# Altium PCB MainBoard_PCB.PcbDoc (part 1 of 2)
Units mm, origin at the board's own origin, x right, y up, seen from the top; angles counter-clockwise.
Board outline 240.1 x 211.02 mm, 2 copper layers (Top Layer, Bottom Layer), stack 3 mm thick; 164 components, 42 nets, 290 pads, 108 vias.
Unrouted connection lines stored in the file: 1.
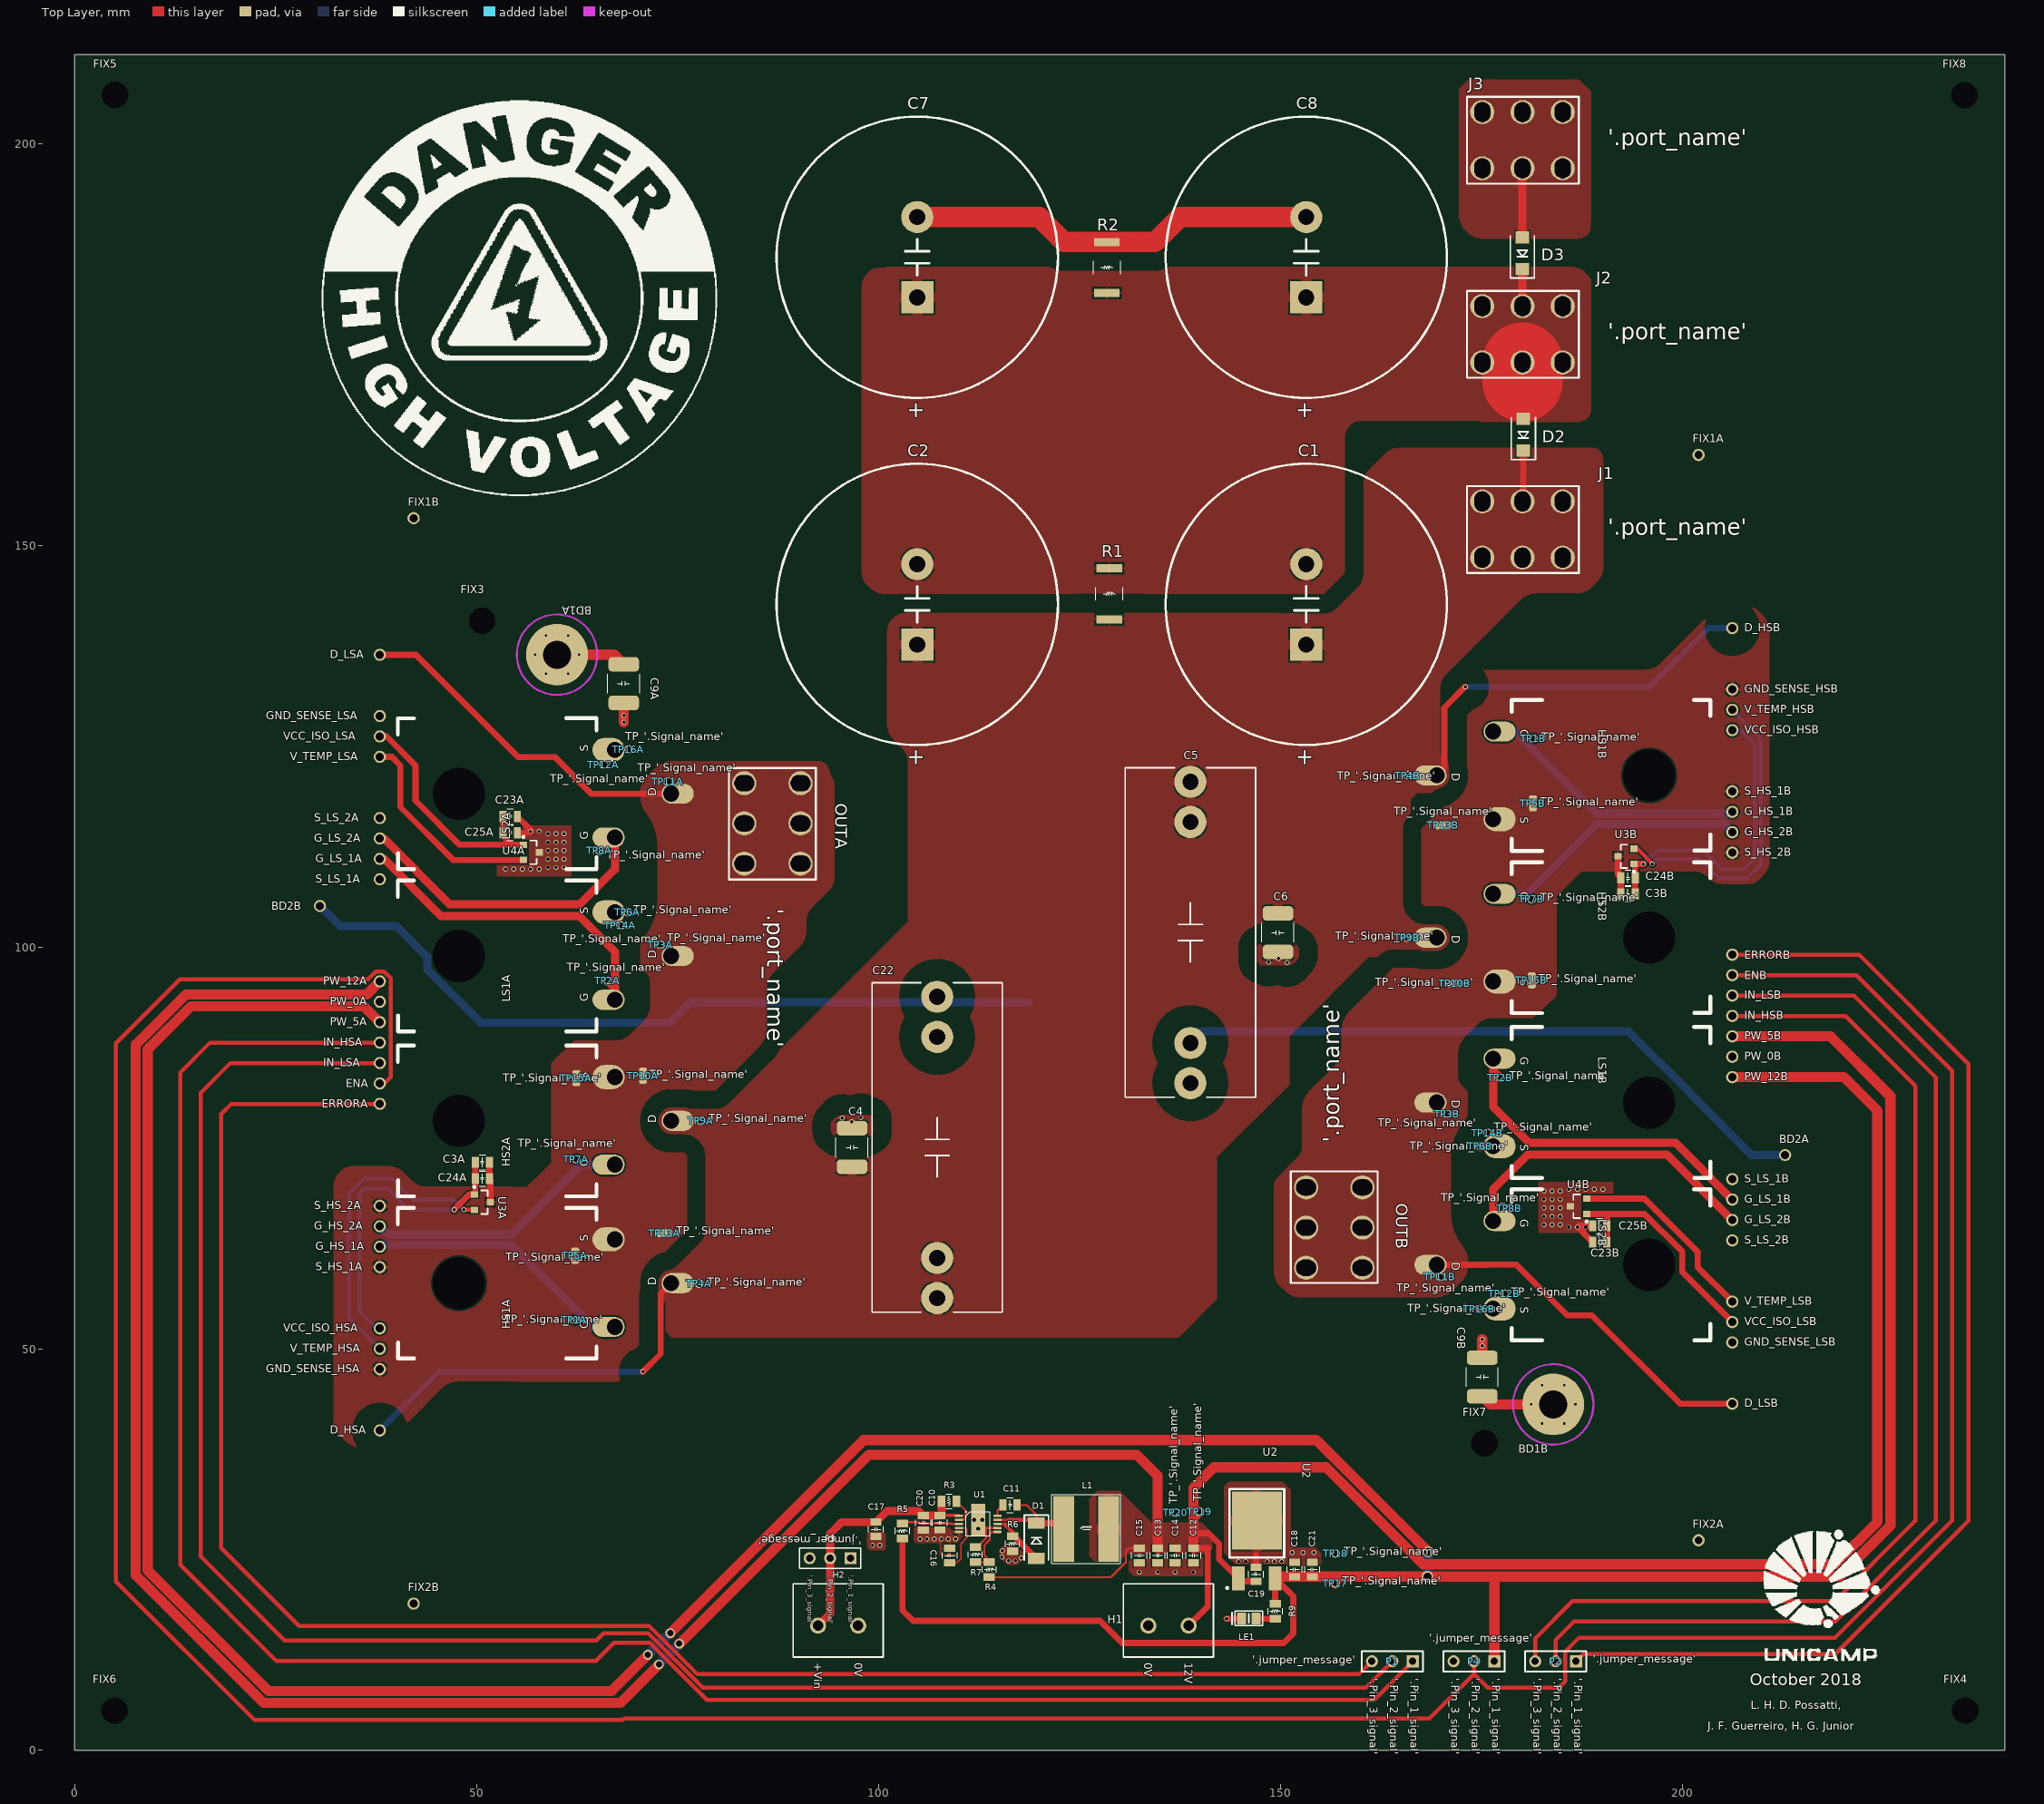
[diagram p0: Top Layer view]
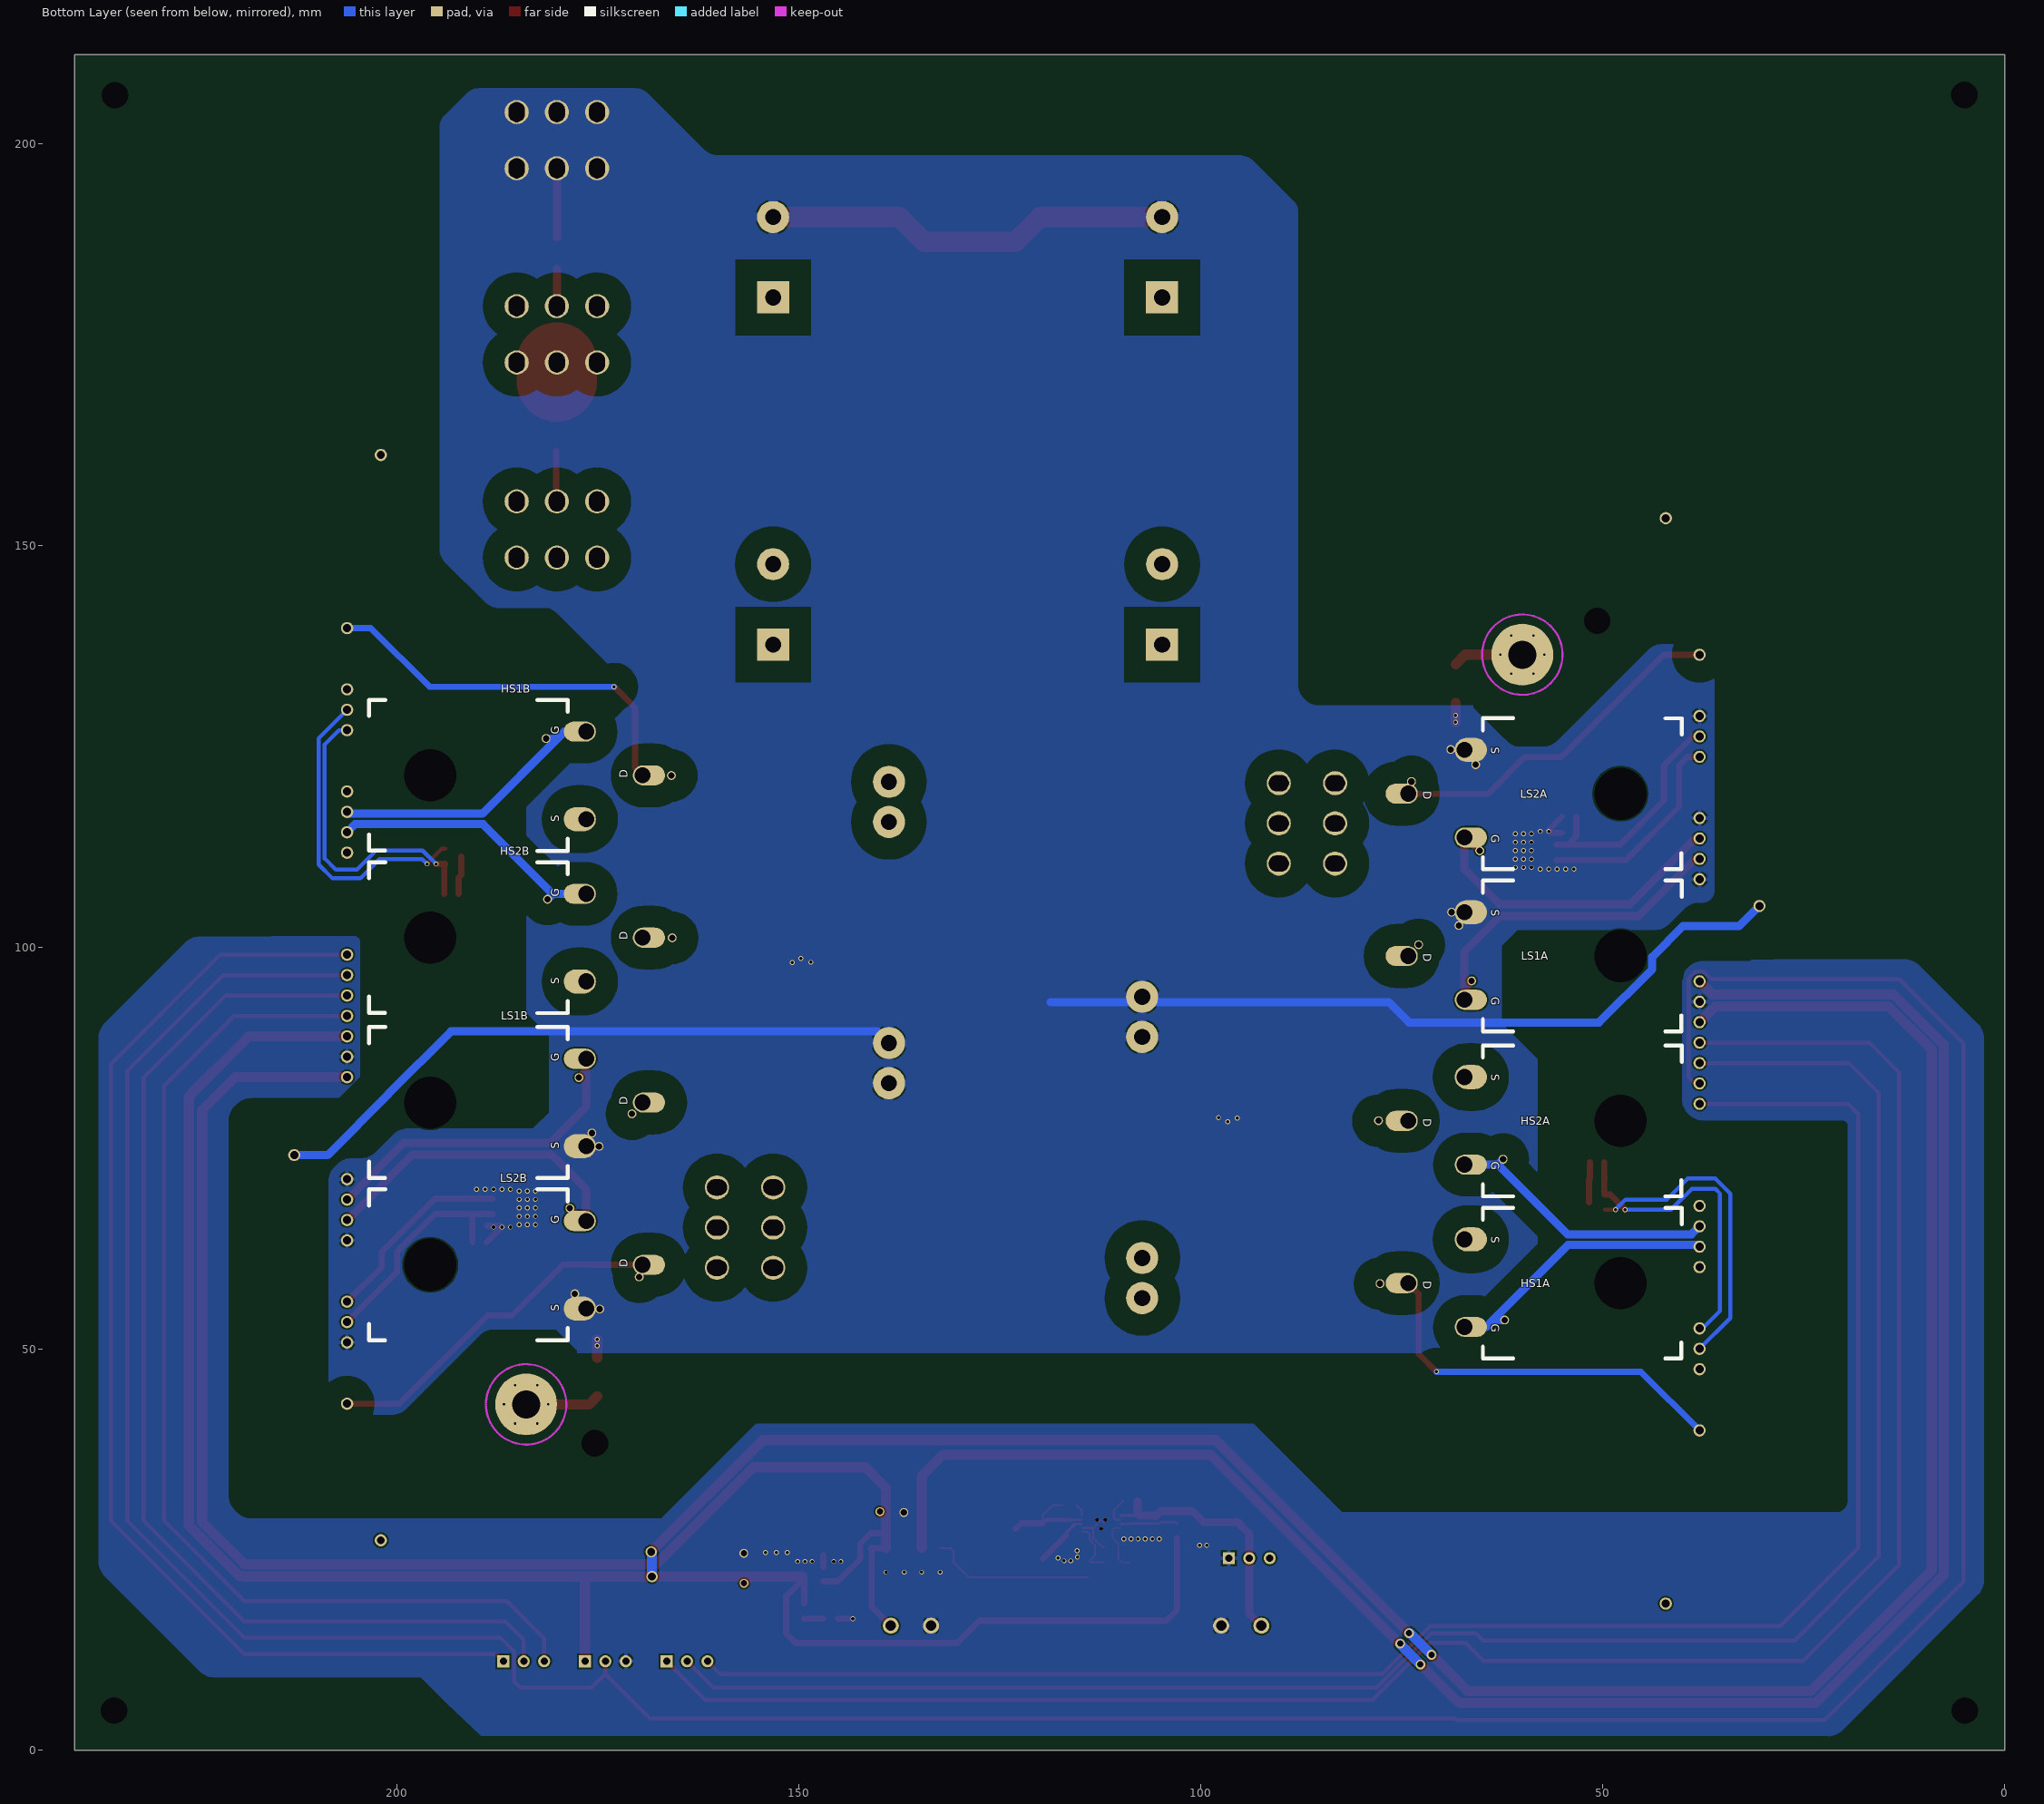
[diagram p1: Bottom Layer view, seen from below]
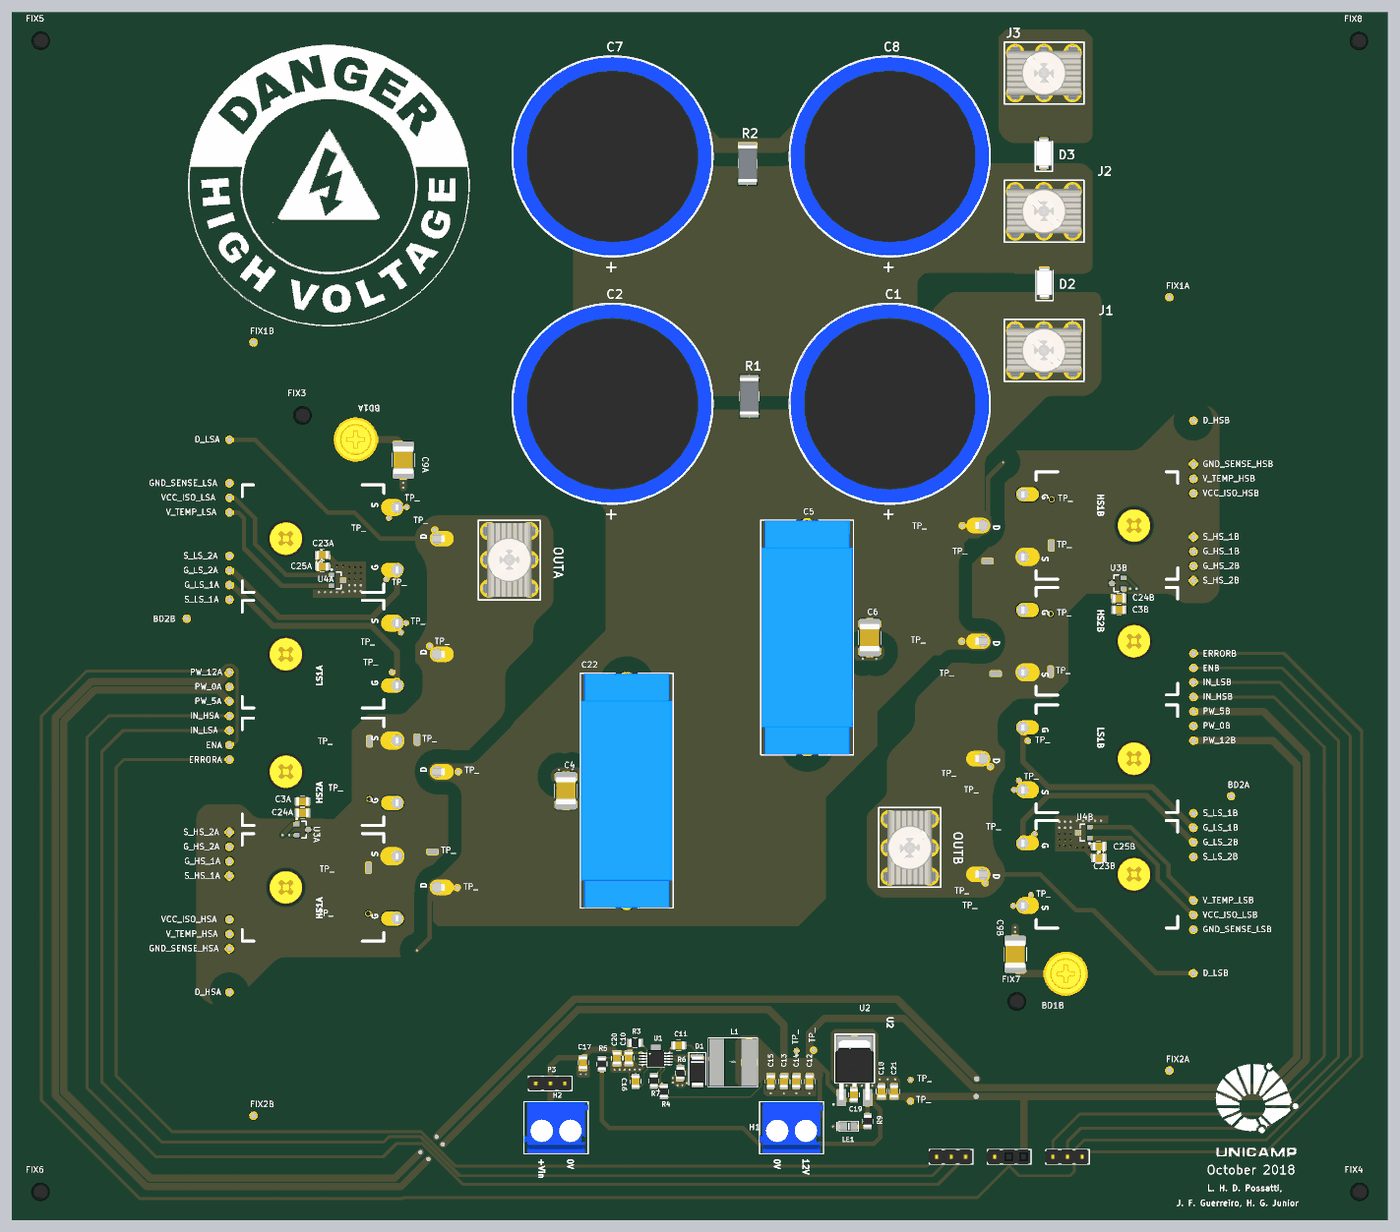
[diagram p3: 3D render of the assembled board from above, using the file's embedded part models]
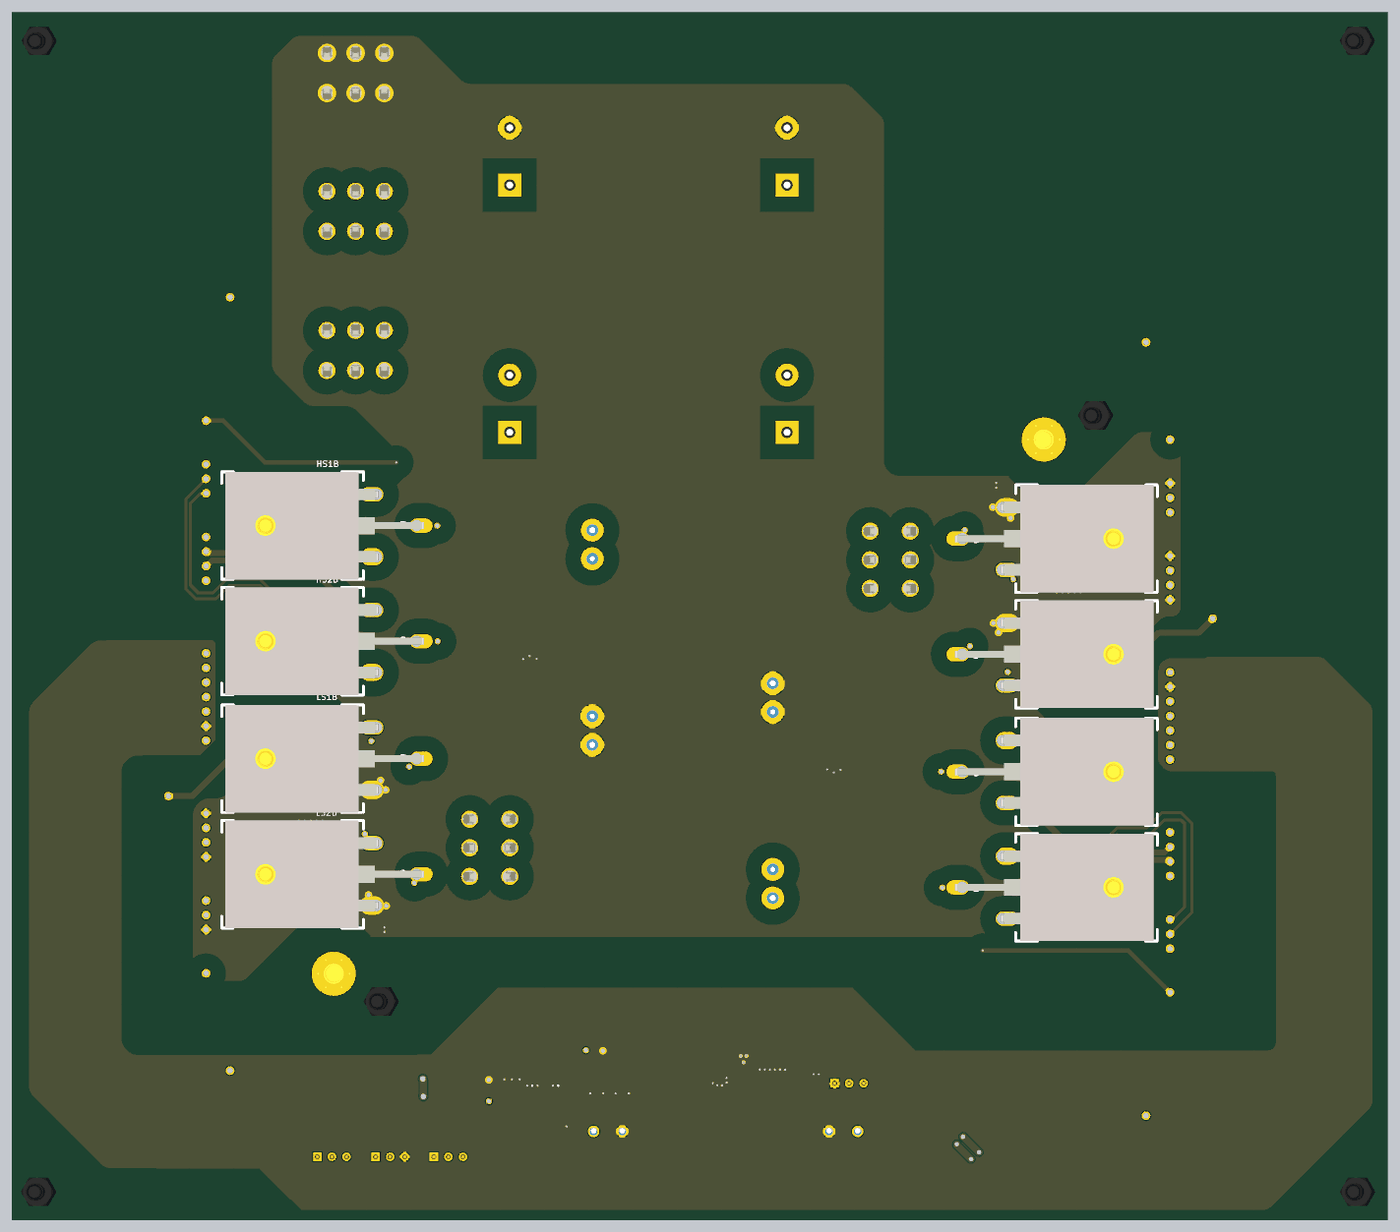
[diagram p4: 3D render of the assembled board from below, using the file's embedded part models]

## Layer stack, top to bottom
Top Solder: solder mask 0.0102, Solder Resist, Dk 3.5
Top Layer: signal copper 0.7
Dielectric 1: dielectric 1.6, FR-4, Dk 4.8
Bottom Layer: signal copper 0.7
Bottom Solder: solder mask 0.0102, Solder Resist, Dk 3.5

## Board outline
0,0 240.1,0 240.1,211.023 0,211.023

## Design rules (kind name [scope] priority, off if disabled: settings)
Clearance High_voltage_tented_vias [(ObjectKind = 'Via') And ((SolderMaskTentingTop = 'True') AND (SolderMaskTentingBottom = 'True')) And    InNetClass('-DC_link_level') vs InNetClass('+DC_link_level') OR InNetClass('Output_voltage_level') OR InNetClass('Other_high_voltage')] p1: gap=2.7 ignorepadtopadclearanceinfootprint=FALSE except(0.254: Arc-Text Track-Text SMDPad-Text THPad-Text Via-Text Fill-Text Poly-Text Region-Text Text-Text Text-Hole; 2.3: Arc-Arc Arc-Track Arc-Via Arc-Fill Arc-Poly Arc-Region Track-Track Track-Via Track-Fill Track-Poly Track-Region Via-Via Fill-Fill Fill-Poly Fill-Region Poly-Poly Poly-Region Region-Region; 3: SMDPad-SMDPad SMDPad-THPad SMDPad-Hole THPad-THPad THPad-Hole Via-Hole)
Clearance High_Voltage_case1 [InNetClass('+DC_link_level') vs InNetClass('-DC_link_level') OR InNetClass('Output_voltage_level') OR InNetClass('Other_high_voltage')] p2: gap=2.7 ignorepadtopadclearanceinfootprint=FALSE except(0.254: Arc-Text Track-Text SMDPad-Text THPad-Text Via-Text Fill-Text Poly-Text Region-Text Text-Text Text-Hole; 2.3: Arc-Arc Arc-Track Arc-Fill Arc-Poly Arc-Region Track-Track Track-Fill Track-Poly Track-Region Fill-Fill Fill-Poly Fill-Region Poly-Poly Poly-Region Region-Region; 3: SMDPad-SMDPad SMDPad-THPad SMDPad-Via SMDPad-Hole THPad-THPad THPad-Via THPad-Hole Via-Via Via-Hole)
Clearance High_Voltage_case2 [InNetClass('-DC_link_level') vs InNetClass('Output_voltage_level') OR InNetClass('Other_high_voltage')] p3: gap=2.7 ignorepadtopadclearanceinfootprint=FALSE except(0.254: Arc-Text Track-Text SMDPad-Text THPad-Text Via-Text Fill-Text Poly-Text Region-Text Text-Text Text-Hole; 2.3: Arc-Arc Arc-Track Arc-Fill Arc-Poly Arc-Region Track-Track Track-Fill Track-Poly Track-Region Fill-Fill Fill-Poly Fill-Region Poly-Poly Poly-Region Region-Region; 3: SMDPad-SMDPad SMDPad-THPad SMDPad-Via SMDPad-Hole THPad-THPad THPad-Via THPad-Hole Via-Via Via-Hole)
Clearance High_Voltage_case3 [InNetClass('Output_voltage_level') vs InNetClass('Other_high_voltage')] p4: gap=2.7 ignorepadtopadclearanceinfootprint=FALSE except(0.254: Arc-Text Track-Text SMDPad-Text THPad-Text Via-Text Fill-Text Poly-Text Region-Text Text-Text Text-Hole; 2.3: Arc-Arc Arc-Track Arc-Fill Arc-Poly Arc-Region Track-Track Track-Fill Track-Poly Track-Region Fill-Fill Fill-Poly Fill-Region Poly-Poly Poly-Region Region-Region; 3: SMDPad-SMDPad SMDPad-THPad SMDPad-Via SMDPad-Hole THPad-THPad THPad-Via THPad-Hole Via-Via Via-Hole)
Clearance High_Voltage_case4 [InNetClass('+DC_link_level') OR InNetClass('-DC_link_level') OR InNetClass('Output_voltage_level') OR InNetClass('Other_high_voltage') vs Not(InNetClass('+DC_link_level') OR InNetClass('-DC_link_level') OR InNetClass('Output_voltage_level') OR InNetClass('Other_high_voltage')) AND InLayerClass('Electrical Layers')] p5: gap=4 ignorepadtopadclearanceinfootprint=TRUE except(0.254: Arc-Text Track-Text SMDPad-Text THPad-Text Via-Text Fill-Text Poly-Text Region-Text Text-Text Text-Hole; 3.5: Arc-Fill Arc-Poly Arc-Region Track-Fill Track-Poly Track-Region Fill-Fill Fill-Poly Fill-Region Poly-Poly Poly-Region Region-Region; 5: Arc-Hole Track-Hole SMDPad-SMDPad SMDPad-THPad SMDPad-Via SMDPad-Hole THPad-THPad THPad-Via THPad-Hole Via-Via Via-Hole Fill-Hole Poly-Hole Region-Hole)
Clearance [All] p6: gap=0.203 ignorepadtopadclearanceinfootprint=TRUE
ComponentClearance Test_points [InComponentClass('test_point') vs InComponentClass('Mosfets') OR InComponentClass('test_point')] p1: gap=0 collisioncheckmode=3 verticalgap=0 showdistances=FALSE
ComponentClearance Mosfets_positioning [InComponentClass('Mosfets') vs InComponentClass('Mosfets')] p2: gap=0 collisioncheckmode=3 verticalgap=0.254 showdistances=FALSE
ComponentClearance [All] p3: gap=0.254 collisioncheckmode=3 verticalgap=0.254 showdistances=FALSE
Height [All] p1: minheight=0 maxheight=50 prefheight=12.7
HoleSize [All] p1: absolutevalues=TRUE maxlimit=6.6 minlimit=0.3 maxpercent=80.000 minpercent=20.000
HoleToHoleClearance [NOT InComponentClass('test_point') vs NOT InComponentClass('test_point')] p1: gap=0.254 allowstackedmicrovias=TRUE
MinimumSolderMaskSliver [All] p1: minsoldermaskwidth=0.152
PolygonConnect Direct_connect [InComponentClass('Direct_plane_connect')] p1: connectstyle=Direct reliefconductorwidth=0.254 reliefentries=4 polygonreliefangle="90 Angle" airgapwidth=0.254
PolygonConnect strong_connections [InComponentClass('strong_connection')] p2: connectstyle=Relief reliefconductorwidth=1.25 reliefentries=4 polygonreliefangle="90 Angle" airgapwidth=0.2
PolygonConnect [All] p3: thpad.connectstyle=Relief thpad.reliefconductorwidth=0.5 thpad.reliefentries=4 thpad.polygonreliefangle="90 Angle" thpad.airgapwidth=0.254 smdpad.connectstyle=Relief smdpad.reliefconductorwidth=0.254 smdpad.reliefentries=4 smdpad.polygonreliefangle="90 Angle" smdpad.airgapwidth=0.254 via.connectstyle=Direct via.reliefconductorwidth=0.254 via.reliefentries=4 via.polygonreliefangle="90 Angle" via.airgapwidth=0.254
RoutingVias [All] p1: holewidth=0.4 width=0.6 viastyle="Through Hole" minholewidth=0.3 minwidth=0.5 maxholewidth=1 maxwidth=2
SilkToSolderMaskClearance [IsPad] p1: minsilkscreentomaskgap=0.152 clearancetoexposedcopper=TRUE
SolderMaskExpansion [All] p1: expansion=0.102
UnRoutedNet [All] p1: checkbadconnections=TRUE
Width Power_traces [InNetClass('+DC_link_level') OR InNetClass('Output_voltage_level') OR InNetClass('Other_high_voltage') OR InNetClass('-DC_link_level')] p1: maxlimit=100 minlimit=0.508 preferedwidth=15 toplayer_maxwidth=100 bottomlayer_prefwidth=15 minimp=50.000000 maximp=50.000000 favimp=50.000000
Width [All] p2: maxlimit=2.54 minlimit=0.152 preferedwidth=0.508 minimp=50.000000 maximp=50.000000 favimp=50.000000
23 further rules are at their usual default settings.

## Classes and differential pairs
net class GND_SENSE_LSB_Nets: -DC_link
net class GND_SENSE_LSA_Nets: -DC_link
net class GND_SENSE_HSB_Nets: Source_HSB
net class GND_SENSE_HSA_Nets: Source_HSA
component class strong_connection: C1 C2 C4 C5 C6 C7 C8 C12 C13 C14 C15 C18 C19 C21 C22 D2 D3 H1 H2 L1 R6 U2
net class J3_Nets: -DC_link
net class D3_Nets: -DC_link NetC1_2
net class TP20_Nets: GND
net class TP19_Nets: +12V
net class TP18_Nets: GND
net class TP17_Nets: +5V
component class top_level_sheet: FIX3 FIX4 FIX5 FIX6 FIX7 FIX8
net class BD2B_Nets: -DC_link
net class BD2A_Nets: -DC_link
net class C25B_Nets: 5V_LSB -DC_link
net class C25A_Nets: 5V_LSA -DC_link
net class C24B_Nets: 5V_HSB Source_HSB
net class C24A_Nets: 5V_HSA Source_HSA
net class C23B_Nets: 5V_LSB -DC_link
net class C23A_Nets: 5V_LSA -DC_link
net class C3B_Nets: 5V_HSB Source_HSB
net class C3A_Nets: 5V_HSA Source_HSA
component class Mosfets: HS1A HS1B HS2A HS2B LS1A LS1B LS2A LS2B
component class test_point: TP1A TP1B TP2A TP2B TP3A TP3B TP4A TP4B TP5A TP5B TP6A TP6B TP7A TP7B TP8A TP8B TP9A TP9B TP10A TP10B TP11A TP11B TP12A TP12B TP13A TP13B TP14A TP14B TP15A TP15B TP16A TP16B
net class TP3B_Nets: Source_HSB
net class TP3A_Nets: Source_HSA
net class V_TEMP_LSB_Nets: Temp_LSB
net class V_TEMP_LSA_Nets: Temp_LSA
net class V_TEMP_HSB_Nets: Temp_HSB
net class V_TEMP_HSA_Nets: Temp_HSA
net class U4B_Nets: 5V_LSB -DC_link Temp_LSB
net class U4A_Nets: 5V_LSA -DC_link Temp_LSA
net class U3B_Nets: 5V_HSB Source_HSB Temp_HSB
net class U3A_Nets: 5V_HSA Source_HSA Temp_HSA
net class VCC_ISO_LSB_Nets: 5V_LSB
net class VCC_ISO_LSA_Nets: 5V_LSA
net class VCC_ISO_HSB_Nets: 5V_HSB
net class VCC_ISO_HSA_Nets: 5V_HSA
net class TP16B_Nets: -DC_link
net class TP16A_Nets: -DC_link
net class TP15B_Nets: Source_HSB
net class TP15A_Nets: Source_HSA
net class TP14B_Nets: -DC_link
net class TP14A_Nets: -DC_link
net class TP13B_Nets: Source_HSB
net class TP13A_Nets: Source_HSA
net class TP12B_Nets: -DC_link
net class TP12A_Nets: -DC_link
net class TP11B_Nets: Source_HSB
net class TP11A_Nets: Source_HSA
net class TP10B_Nets: Source_HSB
net class TP10A_Nets: Source_HSA
net class TP9B_Nets: +DC_link
net class TP9A_Nets: +DC_link
net class TP8B_Nets: Gate_LS_2B
net class TP8A_Nets: Gate_LS_2A
net class TP7B_Nets: Gate_HS_2B
net class TP7A_Nets: Gate_HS_2A
net class TP6B_Nets: -DC_link
net class TP6A_Nets: -DC_link
net class TP5B_Nets: Source_HSB
net class TP5A_Nets: Source_HSA
net class TP4B_Nets: +DC_link
net class TP4A_Nets: +DC_link
net class TP2B_Nets: Gate_LS_1B
net class TP2A_Nets: Gate_LS_1A
net class TP1B_Nets: Gate_HS_1B
net class TP1A_Nets: Gate_HS_1A
net class S_LS_2B_Nets: -DC_link
net class S_LS_2A_Nets: -DC_link
net class S_LS_1A_Nets: -DC_link
net class PW_5B_Nets: +5V
net class PW_0A_Nets: GND
net class IN_LSB_Nets: NetIN_LSB_1
net class IN_LSA_Nets: NetIN_LSA_1
net class IN_HSB_Nets: NetIN_HSB_1
net class IN_HSA_Nets: NetIN_HSA_1
net class ERRORB_Nets: NetERRORB_1
net class ERRORA_Nets: NetERRORA_1
net class ENA_Nets: Enable
net class D_LSB_Nets: Source_HSB
net class D_LSA_Nets: Source_HSA
net class D_HSB_Nets: +DC_link
net class D_HSA_Nets: +DC_link
net class OUTB_Nets: Source_HSB
net class OUTA_Nets: Source_HSA
net class LS2B_Nets: -DC_link Gate_LS_2B Source_HSB
net class LS2A_Nets: -DC_link Gate_LS_2A Source_HSA
net class LS1B_Nets: -DC_link Gate_LS_1B Source_HSB
net class LS1A_Nets: -DC_link Gate_LS_1A Source_HSA
net class HS2B_Nets: +DC_link Gate_HS_2B Source_HSB
net class HS2A_Nets: +DC_link Gate_HS_2A Source_HSA
net class HS1B_Nets: +DC_link Gate_HS_1B Source_HSB
net class HS1A_Nets: +DC_link Gate_HS_1A Source_HSA
net class S_LS_1B_Nets: -DC_link
net class G_LS_2B_Nets: Gate_LS_2B
net class G_LS_2A_Nets: Gate_LS_2A
net class G_LS_1B_Nets: Gate_LS_1B
net class G_LS_1A_Nets: Gate_LS_1A
net class S_HS_1B_Nets: Source_HSB
net class S_HS_2B_Nets: Source_HSB
net class S_HS_2A_Nets: Source_HSA
net class G_HS_2B_Nets: Gate_HS_2B
net class G_HS_2A_Nets: Gate_HS_2A
net class S_HS_1A_Nets: Source_HSA
net class G_HS_1B_Nets: Gate_HS_1B
net class G_HS_1A_Nets: Gate_HS_1A
net class PW_0B_Nets: GND
net class PW_5A_Nets: +5V
net class C9B_Nets: -DC_link Heatsink
net class C22_Nets: +DC_link -DC_link
component class Direct_plane_connect: C9A C9B C10 C17 C20 HS1A HS1B HS2A HS2B J1 J2 J3 LS1A LS1B LS2A LS2B OUTA OUTB TP1A TP1B TP2A TP2B TP3A TP3B TP4A TP4B TP5A TP5B TP6A TP6B TP7A TP7B TP8A TP8B TP9A TP9B TP10A TP10B TP11A TP11B TP12A TP12B TP13A TP13B TP14A TP14B TP15A TP15B TP16A TP16B TP17 TP18 TP19 TP20 U4A U4B
net class Other_high_voltage: Heatsink NetC1_2
net class +DC_link_level: +DC_link
net class -DC_link_level: 5V_LSA 5V_LSB -DC_link Gate_LS_1A Gate_LS_1B Gate_LS_2A Gate_LS_2B Temp_LSA Temp_LSB
net class Output_voltage_level: 5V_HSA 5V_HSB Gate_HS_1A Gate_HS_1B Gate_HS_2A Gate_HS_2B Source_HSA Source_HSB Temp_HSA Temp_HSB
net class C21_Nets: +5V GND
net class C20_Nets: GND Vin
polygon class Direct_plane_connect: -DC_link_A_side_plane -DC_link_B_side_plane -DC_link_bypass_plane_B Buck_GND_input GND_buck_freewheeling_plane2 LS_temperature_sensor_A LS_temperature_sensor_B
component class Buck_circuit: C10 C11 C12 C13 C14 C15 C16 C20 D1 L1 R3 R4 R5 R6 R7 U1
net class U2_Nets: +5V +12V GND
net class U1_Nets: Buck_SW GND NetC11_1 NetC16_1 NetD1_1 NetR3_2 NetR4_1 NetR5_2 Vin
net class R9_Nets: +5V NetLE1_1
net class R7_Nets: GND NetR4_1
net class R6_Nets: GND NetD1_1
net class R5_Nets: +5V NetR5_2
net class R4_Nets: +12V NetR4_1
net class R3_Nets: NetR3_2 Vin
net class R2_Nets: -DC_link NetC1_2
net class R1_Nets: +DC_link NetC1_2
net class P4_Nets: +5V Enable GND
net class P3_Nets: Earth GND Vin
net class P2_Nets: NetERRORB_1 NetIN_HSB_1 NetIN_LSB_1
net class P1_Nets: NetERRORA_1 NetIN_HSA_1 NetIN_LSA_1
net class LE1_Nets: GND NetLE1_1
net class L1_Nets: +12V Buck_SW
net class J2_Nets: NetC1_2
net class J1_Nets: +DC_link
net class H2_Nets: GND Vin
net class H1_Nets: +12V GND
net class D2_Nets: +DC_link NetC1_2
net class D1_Nets: Buck_SW NetD1_1
net class PW_12B_Nets: +12V
net class PW_12A_Nets: +12V
net class ENB_Nets: Enable
net class C19_Nets: +12V GND
net class C18_Nets: +5V GND
net class C17_Nets: GND Vin
net class C16_Nets: GND NetC16_1
net class C15_Nets: +12V GND
net class C14_Nets: +12V GND
net class C13_Nets: +12V GND
net class C12_Nets: +12V GND
net class C11_Nets: Buck_SW NetC11_1
net class C10_Nets: GND Vin
net class C9A_Nets: -DC_link Heatsink
net class C8_Nets: -DC_link NetC1_2
net class C7_Nets: -DC_link NetC1_2
net class C6_Nets: +DC_link -DC_link
net class C5_Nets: +DC_link -DC_link
net class C4_Nets: +DC_link -DC_link
net class C2_Nets: +DC_link NetC1_2
net class C1_Nets: +DC_link NetC1_2
net class BD1A_Nets: Heatsink
net class BD1B_Nets: Heatsink
channel class Halfbridge: HalfBridge_A HalfBridge_B
channel class gatedriver_interface: Driver_IO1 Driver_IO2
component class U_FullBridge: C1 C2 C4 C5 C6 C7 C8 C22 R1 R2
component class Main_power_supply: C10 C11 C12 C13 C14 C15 C16 C17 C18 C19 C20 C21 D1 H1 H2 L1 LE1 P3 R3 R4 R5 R6 R7 R9 TP17 TP18 TP19 TP20 U1 U2
component class "HalfBridge Commands": P1 P2 P4
component class HalfBridge_B: BD1B C3B C9B C23B C24B C25B HS1B HS2B LS1B LS2B OUTB TP1B TP2B TP3B TP4B TP5B TP6B TP7B TP8B TP9B TP10B TP11B TP12B TP13B TP14B TP15B TP16B TP?B U3B U4B
component class HalfBridge_A: BD1A C3A C9A C23A C24A C25A HS1A HS2A LS1A LS2A OUTA TP1A TP2A TP3A TP4A TP5A TP6A TP7A TP8A TP9A TP10A TP11A TP12A TP13A TP14A TP15A TP16A TP?A U3A U4A
component class Driver_IO2: BD2B D_HSB D_LSB ENB ERRORB FIX1B FIX2B G_HS_1B G_HS_2B G_LS_1B G_LS_2B GND_SENSE_HSB GND_SENSE_LSB IN_HSB IN_LSB PW_0B PW_5B PW_12B S_HS_1B S_HS_2B S_LS_1B S_LS_2B V_TEMP_HSB V_TEMP_LSB VCC_ISO_HSB VCC_ISO_LSB
component class Driver_IO1: BD2A D_HSA D_LSA ENA ERRORA FIX1A FIX2A G_HS_1A G_HS_2A G_LS_1A G_LS_2A GND_SENSE_HSA GND_SENSE_LSA IN_HSA IN_LSA PW_0A PW_5A PW_12A S_HS_1A S_HS_2A S_LS_1A S_LS_2A V_TEMP_HSA V_TEMP_LSA VCC_ISO_HSA VCC_ISO_LSA
component class DC_link_input: D2 D3 J1 J2 J3

## Components (designator, comment, footprint, x,y, rotation, side; value= is the part's Value field where it differs from the comment)
BD1A "Place near output plane" Bonding_screw 60.001,136.374 r0 top value="Pan Head" (schematic designator BD1)
BD1B "Place near output plane" Bonding_screw 183.944,43.069 r180 top value="Pan Head" (schematic designator BD1)
BD2A "Place far from sensitive circuits" Bonding_pad 212.794,74.095 r0 top value=none (schematic designator BD2)
BD2B "Place far from sensitive circuits" Bonding_pad 30.5,105.1 r0 top value=none (schematic designator BD2)
C1 "MAL215953102E3" "Radial 35D40H10P" 153.219,142.627 r270 top value=1000uF/250V
C2 "MAL215953102E3" "Radial 35D40H10P" 104.819,142.627 r270 top value=1000uF/250V
C3A "0805" "Capacitor 0805" 50.715,73.203 r0 top value=2u2/50V (schematic designator C3)
C3B "0805" "Capacitor 0805" 193.235,106.604 r180 top value=2u2/50V (schematic designator C3)
C4 "ceramic HV" "CAPACITOR 1812" 96.7,75.05 r90 top value="100nF, 1kV"
C5 "Film Capacitor" "MIXED Film Capacitors" 138.8,101.8 r270 top value="1uF, 630 V"
C6 "ceramic HV" "CAPACITOR 1812" 149.701,101.775 r270 top value="100nF, 1kV"
C7 "MAL215953102E3" "Radial 35D40H10P" 104.819,185.827 r270 top value=1000uF/250V
C8 "MAL215953102E3" "Radial 35D40H10P" 153.219,185.827 r270 top value=1000uF/250V
C9A "Capacitor type Y" "CAPACITOR 1812" 68.301,132.774 r270 top value="1nF, 1kV" (schematic designator C9)
C9B "Capacitor type Y" "CAPACITOR 1812" 175.101,46.474 r90 top value="1nF, 1kV" (schematic designator C9)
C10 "Place close to buck IC" "Capacitor 0805" 107.632,28.346 r270 top value=100nF
C11 "Capacitor 0805" "Capacitor 0805" 116.359,30.541 r0 top value=100nF
C12 "Capacitor 0805" "Capacitor 0805" 139.176,24.274 r270 top value=10uF
C13 "Capacitor 0805" "Capacitor 0805" 134.731,24.275 r270 top value=10uF
C14 "Capacitor 0805" "Capacitor 0805" 136.89,24.275 r270 top value=100nF
C15 "Capacitor 0805" "Capacitor 0805" 132.445,24.275 r270 top value=10nF
C16 "Capacitor 0805" "Capacitor 0805" 108.856,24.257 r90 top value=100nF
C17 "Place close to input" "Capacitor 0805" 99.672,27.527 r270 top value=3.3uF
C18 "Place close do MC7805" "Capacitor 0805" 151.772,22.527 r90 top value=100nF
C19 "Place close do MC7805" "Capacitor 0805" 146.972,21.927 r90 top value=330nF
C20 "Place close to buck IC" "Capacitor 0805" 105.572,28.327 r270 top value=1uF
C21 "Place close do MC7805" "Capacitor 0805" 153.972,22.527 r90 top value=1uF
C22 "Film Capacitor" "MIXED Film Capacitors" 107.3,75.05 r90 top value="1uF, 630 V"
C23A "0805" "Capacitor 0805" 54.173,116.227 r0 top value=2u2/50V (schematic designator C23)
C23B "0805" "Capacitor 0805" 189.729,63.271 r180 top value=2u2/50V (schematic designator C23)
C24A "0805" "Capacitor 0805" 50.715,71.171 r0 top value=100nF/50V (schematic designator C24)
C24B "0805" "Capacitor 0805" 193.235,108.61 r180 top value=100nF/50V (schematic designator C24)
C25A "0805" "Capacitor 0805" 54.173,114.195 r0 top value=100nF/50V (schematic designator C25)
C25B "0805" "Capacitor 0805" 189.729,65.303 r180 top value=100nF/50V (schematic designator C25)
D1 "STPS360AF" "SOD 128" 119.645,26.081 r90 top
D2 "SMAJ550-E3/61" "DO 214" 180.219,163.74 r270 top
D3 "SMAJ550-E3/61" "DO 214" 180.103,186.334 r270 top
D_HSA "Board interconection" "Single pad" 37.954,39.834 r180 top value="Male Header 1 pin - 90 degrees" (schematic designator D_HS)
D_HSB "Board interconection" "Single pad" 206.221,139.674 r0 top value="Male Header 1 pin - 90 degrees" (schematic designator D_HS)
D_LSA "Board interconection" "Single pad" 37.954,136.354 r180 top value="Male Header 1 pin - 90 degrees" (schematic designator D_LS)
D_LSB "Board interconection" "Single pad" 206.221,43.154 r0 top value="Male Header 1 pin - 90 degrees" (schematic designator D_LS)
ENA "Board interconection" "Single pad" 37.954,83.014 r180 top value="Male Header 1 pin - 90 degrees" (schematic designator EN)
ENB "Board interconection" "Single pad" 206.221,96.494 r0 top value="Male Header 1 pin - 90 degrees" (schematic designator EN)
ERRORA "Board interconection" "Single pad" 37.954,80.474 r180 top value="Male Header 1 pin - 90 degrees" (schematic designator ERROR)
ERRORB "Board interconection" "Single pad" 206.221,99.034 r0 top value="Male Header 1 pin - 90 degrees" (schematic designator ERROR)
FIX1A "Interface with GateDriverBoard" "Mounting Hole - GateDriver" 202.021,161.229 r0 top value=none (schematic designator FIX1)
FIX1B "Interface with GateDriverBoard" "Mounting Hole - GateDriver" 42.154,153.354 r0 top value=none (schematic designator FIX1)
FIX2A "Interface with GateDriverBoard" "Mounting Hole - GateDriver" 202.021,26.154 r0 top value=none (schematic designator FIX2)
FIX2B "Interface with GateDriverBoard" "Mounting Hole - GateDriver" 42.154,18.279 r0 top value=none (schematic designator FIX2)
FIX3 "Mounting_hole" "Mounting Hole - M3" 50.69,140.589 r0 top value=none
FIX4 "Mounting_hole" "Mounting Hole - M3" 235.198,4.974 r0 top value=none
FIX5 "Mounting_hole" "Mounting Hole - M3" 5,206.023 r0 top value=none
FIX6 "Mounting_hole" "Mounting Hole - M3" 4.96,4.974 r0 top value=none
FIX7 "Mounting_hole" "Mounting Hole - M3" 175.378,38.227 r0 top value=none
FIX8 "Mounting_hole" "Mounting Hole - M3" 235.098,205.986 r0 top value=none
G_HS_1A "Board interconection" "Single pad" 37.954,62.694 r180 top value="Male Header 1 pin - 90 degrees" (schematic designator G_HS_1)
G_HS_1B "Board interconection" "Single pad" 206.221,116.814 r0 top value="Male Header 1 pin - 90 degrees" (schematic designator G_HS_1)
G_HS_2A "Board interconection" "Single pad" 37.954,65.234 r180 top value="Male Header 1 pin - 90 degrees" (schematic designator G_HS_2)
G_HS_2B "Board interconection" "Single pad" 206.221,114.274 r0 top value="Male Header 1 pin - 90 degrees" (schematic designator G_HS_2)
G_LS_1A "Board interconection" "Single pad" 37.954,110.954 r180 top value="Male Header 1 pin - 90 degrees" (schematic designator G_LS_1)
G_LS_1B "Board interconection" "Single pad" 206.221,68.554 r0 top value="Male Header 1 pin - 90 degrees" (schematic designator G_LS_1)
G_LS_2A "Board interconection" "Single pad" 37.954,113.494 r180 top value="Male Header 1 pin - 90 degrees" (schematic designator G_LS_2)
G_LS_2B "Board interconection" "Single pad" 206.221,66.014 r0 top value="Male Header 1 pin - 90 degrees" (schematic designator G_LS_2)
GND_SENSE_HSA "Board interconection" "Single pad" 37.954,47.454 r90 top value="Male Header 1 pin - 90 degrees" (schematic designator GND_SENSE_HS)
GND_SENSE_HSB "Board interconection" "Single pad" 206.221,132.054 r90 top value="Male Header 1 pin - 90 degrees" (schematic designator GND_SENSE_HS)
GND_SENSE_LSA "Board interconection" "Single pad" 37.954,128.734 r90 top value="Male Header 1 pin - 90 degrees" (schematic designator GND_SENSE_LS)
GND_SENSE_LSB "Board interconection" "Single pad" 206.221,50.774 r90 top value="Male Header 1 pin - 90 degrees" (schematic designator GND_SENSE_LS)
H1 "Screw Terminal 2 pins" OSTTA020161 136.072,15.527 r180 top value="Two wire screw terminal"
H2 "Screw Terminal 2 pins" OSTTA020161 94.973,15.527 r180 top value="Two wire screw terminal"
HS1A "N MOS" "TO247 CUSTOM 4" 64.741,58.158 r270 bottom value="14A, 1200V" (schematic designator HS1)
HS1B "N MOS" "TO247 CUSTOM 4" 178.934,121.35 r90 bottom value="14A, 1200V" (schematic designator HS1)
HS2A "N MOS" "TO247 CUSTOM 4" 64.741,78.354 r270 bottom value="14A, 1200V" (schematic designator HS2)
HS2B "N MOS" "TO247 CUSTOM 4" 178.934,101.154 r90 bottom value="14A, 1200V" (schematic designator HS2)
IN_HSA "Board interconection" "Single pad" 37.954,88.094 r180 top value="Male Header 1 pin - 90 degrees" (schematic designator IN_HS)
IN_HSB "Board interconection" "Single pad" 206.221,91.414 r0 top value="Male Header 1 pin - 90 degrees" (schematic designator IN_HS)
IN_LSA "Board interconection" "Single pad" 37.954,85.554 r180 top value="Male Header 1 pin - 90 degrees" (schematic designator IN_LS)
IN_LSB "Board interconection" "Single pad" 206.221,93.954 r0 top value="Male Header 1 pin - 90 degrees" (schematic designator IN_LS)
J1 "Power connector" "7799 POWER CONNECTOR" 180.119,151.94 r0 top value="Connector 7799"
J2 "Power connector" "7799 POWER CONNECTOR" 180.119,176.24 r0 top value="Connector 7799"
J3 "Power connector" "7799 POWER CONNECTOR" 180.119,200.397 r0 top value="Connector 7799"
L1 "SRN8040-100M" SRN8040 125.841,27.577 r0 top value="10uH / 3.1A"
LE1 "LEDSMD 0805" "LED 0805 Green" 146.072,16.427 r180 top value="LED 0805"
LS1A "N MOS" "TO247 CUSTOM 4" 64.741,98.874 r270 bottom value="14A, 1200V" (schematic designator LS1)
LS1B "N MOS" "TO247 CUSTOM 4" 178.934,80.634 r90 bottom value="14A, 1200V" (schematic designator LS1)
LS2A "N MOS" "TO247 CUSTOM 4" 64.741,119.07 r270 bottom value="14A, 1200V" (schematic designator LS2)
LS2B "N MOS" "TO247 CUSTOM 4" 178.934,60.438 r90 bottom value="14A, 1200V" (schematic designator LS2)
OUTA "Power connector" "7799 POWER CONNECTOR" 86.801,115.374 r270 top value="Connector 7799" (schematic designator OUT)
OUTB "Power connector" "7799 POWER CONNECTOR" 156.701,65.074 r90 top value="Connector 7799" (schematic designator OUT)
P1 "HEADER 3 pins" HDR1X3 166.463,11.1 r180 top
P2 "HEADER 3 pins" HDR1X3 186.783,11.1 r180 top
P3 "HEADER 3 pins" HDR1X3 96.512,23.927 r180 top
P4 "HEADER 3 pins" "HDR1X3 - JUMPER" 176.623,11.1 r180 top
PW_0A "Board interconection" "Single pad" 37.954,93.174 r180 top value="Male Header 1 pin - 90 degrees" (schematic designator PW_0)
PW_0B "Board interconection" "Single pad" 206.221,86.334 r0 top value="Male Header 1 pin - 90 degrees" (schematic designator PW_0)
PW_5A "Board interconection" "Single pad" 37.954,90.634 r180 top value="Male Header 1 pin - 90 degrees" (schematic designator PW_5)
PW_5B "Board interconection" "Single pad" 206.221,88.874 r0 top value="Male Header 1 pin - 90 degrees" (schematic designator PW_5)
PW_12A "Board interconection" "Single pad" 37.954,95.714 r180 top value="Male Header 1 pin - 90 degrees" (schematic designator PW_12)
PW_12B "Board interconection" "Single pad" 206.221,83.794 r0 top value="Male Header 1 pin - 90 degrees" (schematic designator PW_12)
R1 "CRCW2512150KFKEG" "Resistor 2512" 128.719,143.942 r270 top value=150k
R2 "CRCW2512150KFKEG" "Resistor 2512" 128.419,184.55 r270 top value=150k
R3 "Resistor 0805" "Resistor 0805" 108.775,31.013 r0 top value=180k
R4 "Resistor 0805" "Resistor 0805" 113.772,22.527 r270 top value=6.8k
R5 "Resistor 0805" "Resistor 0805" 102.972,27.327 r90 top value=10k
R6 "MCS1632R050FER" "Resistor 0805" 116.672,25.727 r90 top value=50m
R7 "Resistor 0805" "Resistor 0805" 112.045,24.381 r270 top value=1.8k
R9 "Resistor 0805" "Resistor 0805" 149.372,17.327 r90 top value=330
S_HS_1A "Board interconection" "Single pad" 37.954,60.154 r180 top value="Male Header 1 pin - 90 degrees" (schematic designator S_HS_1)
S_HS_1B "Board interconection" "Single pad" 206.221,119.354 r0 top value="Male Header 1 pin - 90 degrees" (schematic designator S_HS_1)
S_HS_2A "Board interconection" "Single pad" 37.954,67.774 r180 top value="Male Header 1 pin - 90 degrees" (schematic designator S_HS_2)
S_HS_2B "Board interconection" "Single pad" 206.221,111.734 r0 top value="Male Header 1 pin - 90 degrees" (schematic designator S_HS_2)
S_LS_1A "Board interconection" "Single pad" 37.954,108.414 r180 top value="Male Header 1 pin - 90 degrees" (schematic designator S_LS_1)
S_LS_1B "Board interconection" "Single pad" 206.221,71.094 r0 top value="Male Header 1 pin - 90 degrees" (schematic designator S_LS_1)
S_LS_2A "Board interconection" "Single pad" 37.954,116.034 r180 top value="Male Header 1 pin - 90 degrees" (schematic designator S_LS_2)
S_LS_2B "Board interconection" "Single pad" 206.221,63.474 r0 top value="Male Header 1 pin - 90 degrees" (schematic designator S_LS_2)
TP1A "Test point" "Test point" 62.201,53.574 r0 top (schematic designator TP1)
TP1B "Test point" "Test point" 181.474,125.934 r180 top (schematic designator TP1)
TP2A "Test point" "Test point" 66.301,95.774 r180 top (schematic designator TP2)
TP2B "Test point" "Test point" 177.374,83.734 r0 top (schematic designator TP2)
TP3A "Test point" "Test point" 72.901,100.274 r0 top (schematic designator TP3)
TP3B "Test point" "Test point" 170.774,79.234 r180 top (schematic designator TP3)
TP4A "Test point" "Test point" 77.7,58.1 r0 top (schematic designator TP4)
TP4B "Test point" "Test point" 165.874,121.334 r180 top (schematic designator TP4)
TP5A "Test point" "Test point SMD" 62.251,61.574 r90 top (schematic designator TP5)
TP5B "Test point" "Test point SMD" 181.424,117.874 r270 top (schematic designator TP5)
TP6A "Test point" "Test point" 68.801,104.324 r0 top (schematic designator TP6)
TP6B "Test point" "Test point" 174.874,75.184 r180 top (schematic designator TP6)
TP7A "Test point" "Test point" 62.401,73.574 r0 top (schematic designator TP7)
TP7B "Test point" "Test point" 181.274,105.934 r180 top (schematic designator TP7)
TP8A "Test point" "Test point" 65.301,111.974 r0 top (schematic designator TP8)
TP8B "Test point" "Test point" 178.501,67.474 r180 top (schematic designator TP8)
TP9A "Test point" "Test point" 77.901,78.374 r0 top (schematic designator TP9)
TP9B "Test point" "Test point" 165.774,101.134 r180 top (schematic designator TP9)
TP10A "Test point" "Test point SMD" 70.701,83.974 r90 top (schematic designator TP10)
TP10B "Test point" "Test point SMD" 171.701,95.474 r0 top (schematic designator TP10)
TP11A "Test point" "Test point" 73.801,120.574 r90 top (schematic designator TP11)
TP11B "Test point" "Test point" 169.874,58.934 r270 top (schematic designator TP11)
TP12A "Test point" "Test point" 65.801,122.674 r90 top (schematic designator TP12)
TP12B "Test point" "Test point" 177.874,56.834 r270 top (schematic designator TP12)
TP13A "Test point" "Test point SMD" 73.401,64.374 r0 top (schematic designator TP13)
TP13B "Test point" "Test point SMD" 170.274,115.134 r180 top (schematic designator TP13)
TP14A "Test point" "Test point" 67.901,102.674 r270 top (schematic designator TP14)
TP14B "Test point" "Test point" 175.774,76.834 r90 top (schematic designator TP14)
TP15A "Test point" "Test point SMD" 62.401,83.674 r270 top (schematic designator TP15)
TP15B "Test point" "Test point SMD" 181.274,95.834 r90 top (schematic designator TP15)
TP16A "Test point" "Test point" 68.901,124.574 r90 top (schematic designator TP16)
TP16B "Test point" "Test point" 174.774,54.934 r270 top (schematic designator TP16)
TP17 "Name of signal" "Test point" 156.836,20.803 r90 top
TP18 "Name of signal" "Test point" 156.862,24.536 r90 top
TP19 "Name of signal" "Test point" 139.92,29.718 r180 top
TP20 "Name of signal" "Test point" 136.948,29.616 r180 top
U1 "Buck Regulador IC" "HVSSOP 10" 112.394,28.195 r270 top value=LM25011
U2 "MC7805BDTG" DPAK-3 144.772,21.427 r270 top value=MC7805
U3A "Temperature sensor HS" "SOT 23" 50.719,68.234 r0 top value=MCP9700 (schematic designator U3)
U3B "Temperature sensor HS" "SOT 23" 193.001,111.274 r180 top value=MCP9700 (schematic designator U3)
U4A "Temperature sensor LS" "SOT 23" 56.801,111.774 r0 top value=MCP9700 (schematic designator U4)
U4B "Temperature sensor LS" "SOT 23" 187.101,67.724 r180 top value=MCP9700 (schematic designator U4)
V_TEMP_HSA "Board interconection" "Single pad" 37.954,49.994 r180 top value="Male Header 1 pin - 90 degrees" (schematic designator V_TEMP_HS)
V_TEMP_HSB "Board interconection" "Single pad" 206.221,129.514 r0 top value="Male Header 1 pin - 90 degrees" (schematic designator V_TEMP_HS)
V_TEMP_LSA "Board interconection" "Single pad" 37.954,123.654 r180 top value="Male Header 1 pin - 90 degrees" (schematic designator V_TEMP_LS)
V_TEMP_LSB "Board interconection" "Single pad" 206.221,55.854 r0 top value="Male Header 1 pin - 90 degrees" (schematic designator V_TEMP_LS)
VCC_ISO_HSA "Board interconection" "Single pad" 37.954,52.534 r180 top value="Male Header 1 pin - 90 degrees" (schematic designator VCC_ISO_HS)
VCC_ISO_HSB "Board interconection" "Single pad" 206.221,126.974 r0 top value="Male Header 1 pin - 90 degrees" (schematic designator VCC_ISO_HS)
VCC_ISO_LSA "Board interconection" "Single pad" 37.954,126.194 r180 top value="Male Header 1 pin - 90 degrees" (schematic designator VCC_ISO_LS)
VCC_ISO_LSB "Board interconection" "Single pad" 206.221,53.314 r0 top value="Male Header 1 pin - 90 degrees" (schematic designator VCC_ISO_LS)

## Footprints (in the part's own frame and the unit in brackets; to place one, negate y for a bottom-side part, rotate by r counter-clockwise, add the part's x,y. Pads: shape width x height; smd on the part's side, far side on the other; paste and mask are expansions set on the pad)
"7799 POWER CONNECTOR" [mm] "Screw M4 and 30A"
  round 3 hole 2 slot 2.5 at 90 deg: 1(-5,-3.5) 1(-5,3.5) 1(0,-3.5) 1(0,3.5) 1(5,-3.5) 1(5,3.5)
  silkscreen extent -6.9,-5.4 7,5.4, body extent -6.43,-4.53 6.45,4.53, height 8.12
Bonding_pad [mm] "Bonding pad"
  round 1.5 hole 1: 1(0,0)
Bonding_screw [mm] "Bonding screw connection using a Pan-Head M3 to connect PCB to the Heatsink"
  round 7.7 hole 3.5: 1(0,0)
  Keep-Out Layer circle w0.254: c0,0 r5
  body extent -3.45,-3.45 3.45,3.45, height 2.5
"Capacitor 0805" [mm] "SMD ceramic Capacitor package 0805"
  rect 0.9x1.39 smd: 1(-0.89,0) 2(0.89,0)
  silkscreen extent -0.38,-0.94 0.38,0.94, body extent -1.1,-0.72 1.1,0.73, height 0.87
"CAPACITOR 1812" [mm] "SMD ceramic capacitor package 1812"
  rrect50% 1.8x3.8 smd: 1(-2.4,0) 2(2.4,0)
  silkscreen extent -1.2,-2 1.2,2, body extent -2.4,-1.75 2.4,1.75, height 1.85
"DO 214" [mm] "DO 214 package"
  rect 1.52x1.68 smd: 1(-1.97,0) 2(1.97,0)
  silkscreen extent -2.15,-1.5 3.1,1.5, body extent -2.5,-1.35 2.5,1.35, height 2.2
DPAK-3 [mm] "Power package for Mosfet or Linear Regulators, 3 pins"
  rect 3x1.6 smd: 1(0,0) 3(0,4.58)
  rect 7.2x6.2 smd: 2(-7.18,2.29)
  silkscreen extent -11.1,-1.61 1.42,5.7, body extent -10.04,-1.07 0.37,5.64, height 2.39
HDR1X3 [mm] "Connector; Header; 3 Position"
  rect 1.5x1.5 hole 0.9: 1(0,0)
  round 1.5 hole 0.9: 2(2.54,0) 3(5.08,0)
  silkscreen extent -1.27,-1.27 6.35,1.27, body extent -1.17,-1.25 6.45,1.25, height 6.2
"HDR1X3 - JUMPER" [mm] "Added a selection jumper to the original footprint HDR1X3"
  rect 1.5x1.5 hole 0.9: 1(0,0)
  round 1.5 hole 0.9: 2(2.54,0) 3(5.08,0)
  silkscreen extent -1.27,-1.27 6.35,1.27, body extent -1.17,-1.25 6.45,1.25, height 8.04
"HVSSOP 10" [mm] "HVSSOP Package, with 10 pins and customized thermal pad for hand soldering facilitation"
  rrect50% 0.3x1.02 smd: 1(-1.001,-2.4) 2(-0.5,-2.4) 3(0,-2.4) 4(0.5,-2.4) 5(1.001,-2.4) 6(1.001,2.4) 7(0.5,2.4) 8(0,2.4) 9(-0.5,2.4) 10(-1.001,2.4)
  rect 4x1.727 smd: 11(-0.5,0)
  silkscreen extent -1.58,-1.58 1.5,1.5, body extent -1.5,-2.45 1.5,2.45, height 1.15
"LED 0805 Green" [mm] "0805 package - green led"
  rect 1.15x1.45 smd: 1(-0.9,0) 2(0.9,0)
  silkscreen extent -1.7,-0.9 2.1,0.9, body extent -1.01,-0.63 1.01,0.62, height 1.1
"MIXED Film Capacitors" [mm] "Mixed footprint including PHE844RR7100MR06L2 and B32794D2106K"
  round 4 hole 2: 1(-18.75,0) 1(-13.75,0) 2(13.75,0) 2(18.75,0)
  silkscreen extent -20.5,-8.1 20.5,8.1, body extent -20.5,-8 20.5,8, height 32
"Mounting Hole - GateDriver" [mil] "Mouting pad"
  round 60 hole 39.37: FIX(0,0)
"Mounting Hole - M3" [mil] "Mouting for M3 standoff"
  round 60 hole 129.92 unplated: ""(0,0)
  body extent -112,-108 133,108, height 474
OSTTA020161 [mm] "Screw terminal - 2 pins"
  round 2 hole 1.3: 1(-2.5,0) 2(2.5,0)
  silkscreen extent -5.6,-5.2 5.6,3.9, body extent -5.6,-5.11 5.6,3.89, height 12.6
"Radial 35D40H10P" [mm] "Electrolytic Capacitor 35mm Diameter, 40mm Height, 10mm Lead Pitch"
  rect 4x4 hole 2: 1(5,0)
  round 4 hole 2: 2(-5,0)
  silkscreen extent -17.5,-17.5 17.5,17.5, body extent -17.5,-17.5 17.5,17.5, height 40.01
"Resistor 0805" [mm] "SMD resistor package 0805"
  rect 0.95x1.4 smd: 1(-0.925,0) 2(0.925,0)
  silkscreen extent -0.38,-0.89 0.38,0.89, body extent -1.1,-0.72 1.1,0.73, height 0.87
"Resistor 2512" [mm] "SMD resistor package 2512"
  rect 1.02x3.18 smd: 1(-3.175,0) 2(3.175,0)
  silkscreen extent -0.8,-1.7 0.8,1.7, body extent -3.18,-1.63 3.17,1.63, height 0.61
"Single pad" [mil] "Pad for 1 single header"
  round 60 hole 39.37: 1(0,0)
"SOD 128" [mm] "SOD 128Flat package"
  rect 1.4x2.1 smd: 1(-2.2,0) 2(2.2,0)
  silkscreen extent -2.4,-1.5 3.2,1.5, body extent -2.5,-1.35 2.5,1.35, height 1.1
"SOT 23" [mm] "SOT23, 3-Leads, Body 2.9x1.3mm, Pitch 0.95mm, Lead Span 2.4mm, IPC Medium Density"
  rect 0.9x0.8 smd: 1(-1,0.95) 2(-1,-0.95) 3(1,0)
  silkscreen extent -1.12,-1.46 0.65,2.02, body extent -1.17,-1.46 1.17,1.46, height 1
SRN8040 [mm] "Footprint for SMD inductor series SRN8040"
  rect 2.6x8.2 smd: 1(-2.8,0) 2(2.8,0)
  silkscreen extent -4.3,-4.3 4.3,4.3, body extent -4,-4 4,4, height 4.01
"Test point" [mm] "Test point pad, to measure with a scope probe without clipper"
  round 1.1 hole 0.8: 1(0,0)
"Test point SMD" [mm] "Test point SMD pad, to be used with a wire soldered in the board and connect to the probe with a spring, to reduce EMI"
  rrect50% 2x1 smd: 1(0,0)
"TO247 CUSTOM 4" [mm] "Application specific version of TO247 package, with right angle bended leads and a offset for the pin in the middle. Designed to be used in the bottom side of PCB"
  oval 2.5x4 hole 2 copper offset 0,0.8: 1(5.45,-2.47)
  oval 2.5x4 hole 2 copper offset 0,-0.8: 2(0,-9.47)
  oval 3x4 hole 2 copper offset 0,0.8: 3(-5.45,-2.47)
  round 0 hole 6.5 unplated: Fixing(0,16.94)
  silkscreen extent -9.39,-0.17 9.39,24.55, body extent -9.4,-10.77 9.4,23.91, height 9.37